# EAGLE board InkTime (EAGLE 9.7.0)
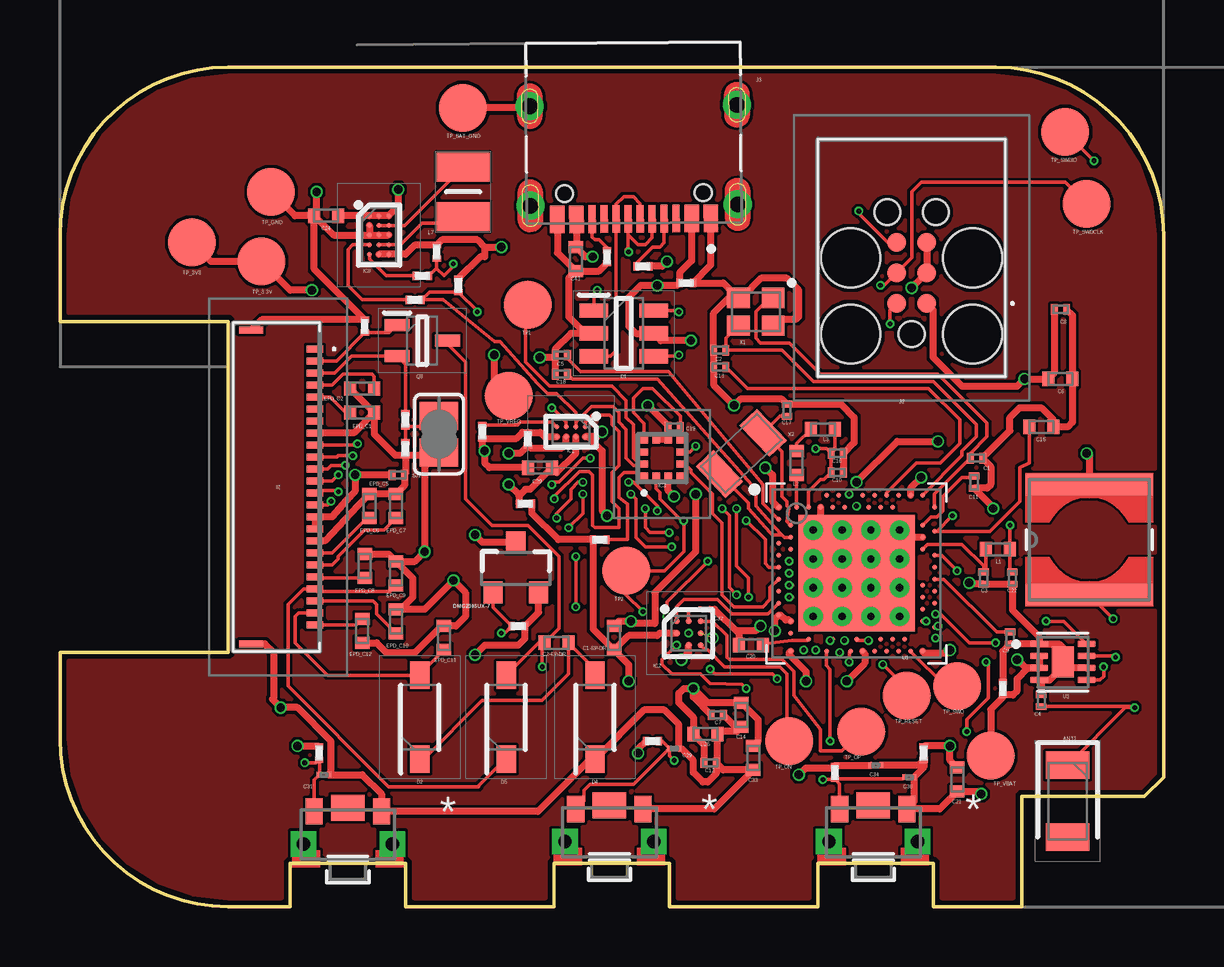
[diagram p0: board, top side]
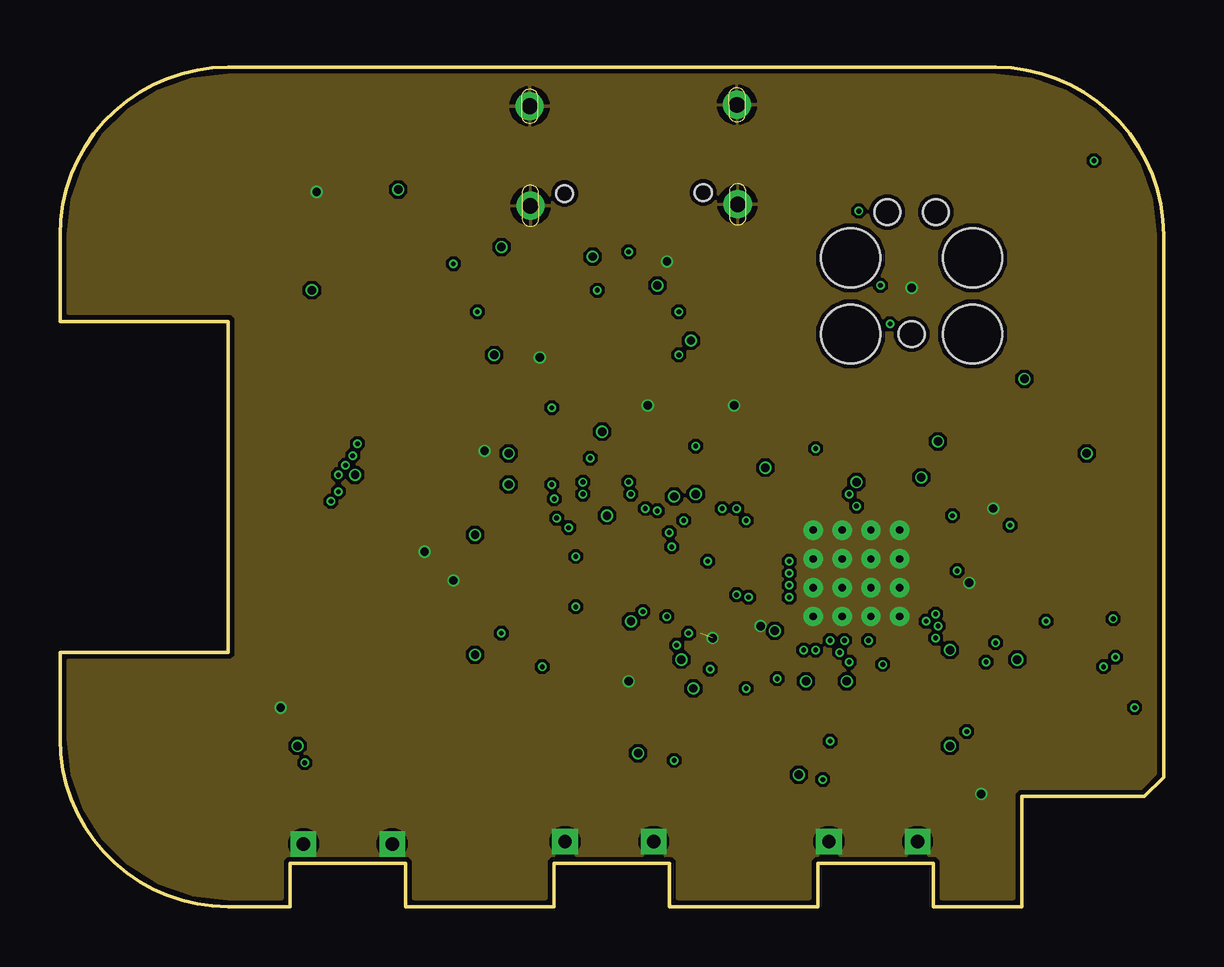
[diagram p1: board, inner layer GND]
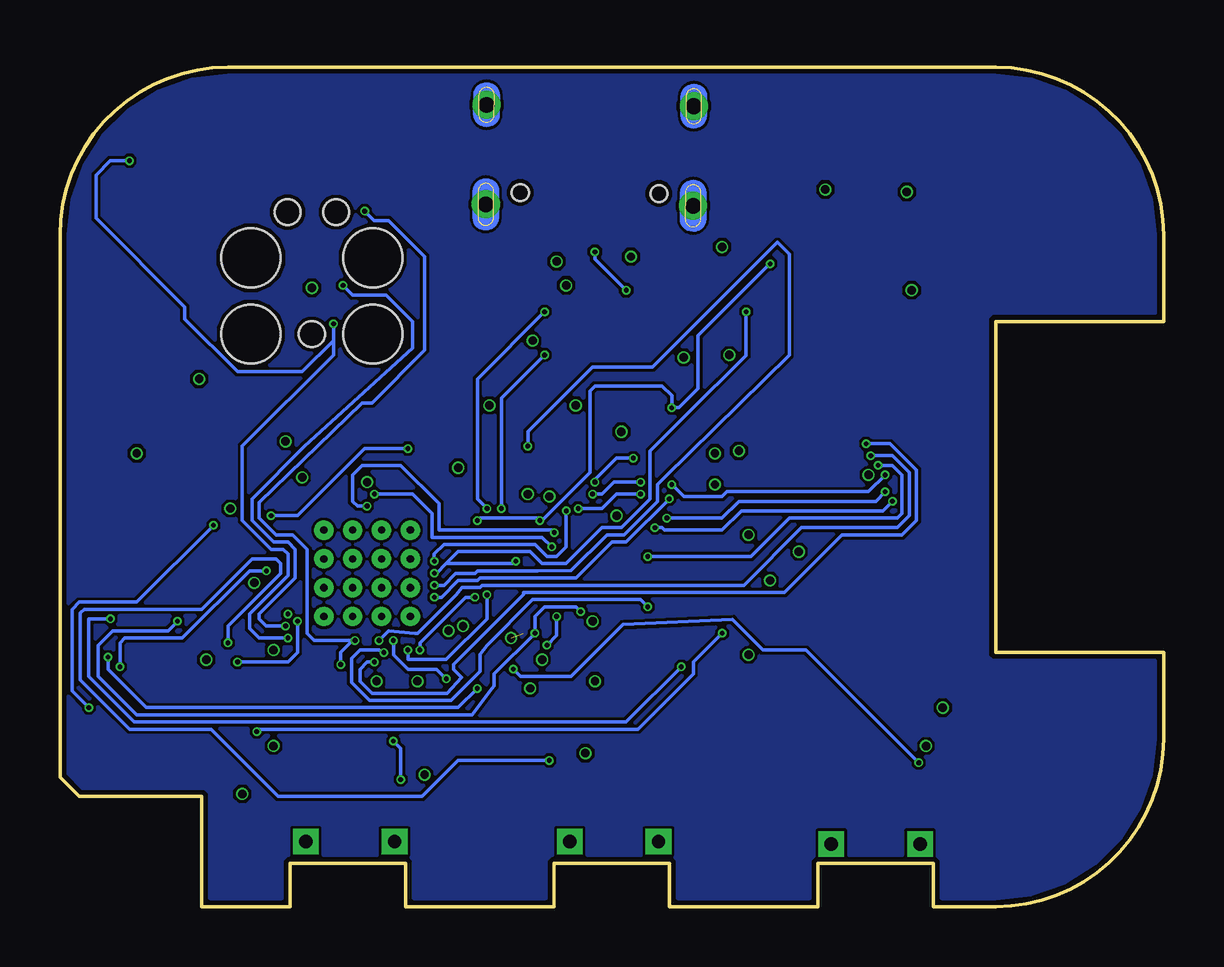
[diagram p2: board, bottom side, seen from below]

Size 46 x 35 mm. Coordinates in mm from the lower left corner, seen from the top.
Outline: 40.1,0 36.4,0 36.4,1.8 31.6,1.8 31.6,0 25.4,0 25.4,1.8 20.6,1.8 20.6,0 14.4,0 14.4,1.8 9.6,1.8 9.6,0 7,0 arc-90 0,7 0,10.6 7,10.6 7,24.4 0,24.4 0,28 arc-90 7,35 39,35 arc-90 46,28 46,5.4 45.2,4.6 40.1,4.6 40.1,0
Copper layers (1+2*63+16): Top / GND / Bottom / layer 63
Stack-up 4 Layer Stack: Top SilkScreen Epoxy Ink / Top SolderMask User Defined 0.02mm Dk 4.3 / Top Surface Finish Lead-Free 0.02mm / Top User Defined 0.03mm / Dielectric-1 User Defined 0.034mm / Dielectric-2 User Defined 0.034mm / GND User Defined 0.03mm / Dielectric-3 User Defined 0.664mm / Power User Defined 0.03mm / Dielectric-4 User Defined 0.034mm / Dielectric-5 User Defined 0.034mm / Bottom User Defined 0.03mm / Bottom Surface Finish Lead-Free 0.02mm / Bottom SolderMask User Defined 0.02mm Dk 4.3 / Bottom SilkScreen Epoxy Ink
Design rules: minimum copper width 5mil, minimum drill size 0.2mm, copper clearance wire_polygon to wire_polygon 5mil, copper clearance wire_polygon to pad_smd 5mil, copper clearance wire_polygon to via 5mil, copper clearance pad_smd to pad_smd 5mil, copper clearance pad_smd to via 5mil, copper clearance via to via 5mil, copper clearance smd to pad (same net) 5mil, copper clearance smd to via (same net) 5mil, copper clearance smd to smd (same net) 5mil, dimension clearance 0.2mm, via restrict clearance 0mil, restrict clearance 0mil, drill distance 6mil, keepout clearance 0mil

## Footprints (pad centres in the part's own frame; a part is rotated, then mirrored left to right if it is on the bottom)
2450AT18B100E_ANTC3216X140N = smd 1.15 x 1.8: 1 -1.5,0; 2 1.5,0
NORDIC_NRF_3_RESC0201_L = smd 0.28 x 0.43: 1 -0.255,0; 2 0.255,0
NORDIC_NRF_3_RESC0402_L = smd 0.5 x 0.6: 1 -0.5,0; 2 0.5,0
GRM011R60J152KE01L_1_0201 = smd 0.35 x 0.25: 1 0,0.275; 2 0,-0.275
GRM011R60J152KE01L_2_CAPC0201X13N = smd 0.22 x 0.23: 1 -0.185,0; 2 0.185,0
ESP32_C6_LIBRARY_3_SOT95P280X145-6N = smd 1.2 x 0.6: 1 -1.25,0.95; 2 -1.25,0; 3 -1.25,-0.95; 4 1.25,-0.95; 5 1.25,0; 6 1.25,0.95
ESP32_C6_LIBRARY_5_SOD3716X135N = smd 1.15 x 0.8: 1 -1.75,0; 2 1.75,0
ESP32_C6_LIBRARY_4_ESP32_C6_LIBRARY_4_ESP32_C6_LIBRARY_4_ESP32_C6_LIBRARY_4_ESP32_WROVER_SPARKFUN-DISCRETESEMI_SOT23-3 = smd 0.8 x 0.9: 1 -0.95,-1; 2 0.95,-1; 3 0,1.1
BQ25180YBGR_BGA8C40P2X4_100X155X50 = smd 0.2 x 0.2: A1 -0.2,0.6; A2 0.2,0.6; B1 -0.2,0.2; B2 0.2,0.2; C1 -0.2,-0.2; C2 0.2,-0.2; D1 -0.2,-0.6; D2 0.2,-0.6
DRV2605YZFR_BGA9C50P3X3_144X144X62 = smd 0.25 x 0.25: A1 -0.5,0.5; A2 0,0.5; A3 0.5,0.5; B1 -0.5,0; B2 0,0; B3 0.5,0; C1 -0.5,-0.5; C2 0,-0.5; C3 0.5,-0.5
BMA423_BMA423 = smd 0.3 x 0.35: 1 -0.75,-0.775; 2 -0.25,-0.775; 3 0.25,-0.775; 4 0.75,-0.775; 7 0.75,0.775; 8 0.25,0.775; 9 -0.25,0.775; 10 -0.75,0.775 | smd 0.35 x 0.3: 5 0.775,-0.25; 6 0.775,0.25; 11 -0.775,0.25; 12 -0.775,-0.25
RT6160AWSC_BGA15C40P3X5_140X230X60 = smd 0.216 x 0.216: A1 -0.4,0.8; A2 0,0.8; A3 0.4,0.8; B1 -0.4,0.4; B2 0,0.4; B3 0.4,0.4; C1 -0.4,0; C2 0,0; C3 0.4,0; D1 -0.4,-0.4; D2 0,-0.4; D3 0.4,-0.4; E1 -0.4,-0.8; E2 0,-0.8; E3 0.4,-0.8
503480-2400_5034802400 = smd 0.3 x 0.7: 1 -5.75,1.525; 2 -5.25,1.525; 3 -4.75,1.525; 4 -4.25,1.525; 5 -3.75,1.525; 6 -3.25,1.525; 7 -2.75,1.525; 8 -2.25,1.525; 9 -1.75,1.525; 10 -1.25,1.525; 11 -0.75,1.525; 12 -0.25,1.525; 13 0.25,1.525; 14 0.75,1.525; 15 1.25,1.525; 16 1.75,1.525; 17 2.25,1.525; 18 2.75,1.525; 19 3.25,1.525; 20 3.75,1.525; 21 4.25,1.525; 22 4.75,1.525; 23 5.25,1.525; 24 5.75,1.525 | smd 0.3 x 1: MP1 -6.54,-1.125; MP2 6.54,-1.125
TC2030-IDC_TC2030IDC = smd 0.783 x 0.783: 1 -0.953,-0.635; 2 -0.953,0.635; 3 0.317,-0.635; 4 0.317,0.635; 5 1.588,-0.635; 6 1.588,0.635 | hole 2.451: -2.223,-2.54; -2.223,2.54; 0.952,-2.54; 0.952,2.54 | hole 1.067: -2.223,0; 2.857,-1.016; 2.857,1.016
KH-TYPE-C-16P_KINGHELM_KH-TYPE-C-16P = smd 0.6 x 1.15: A1_B12 -3.2,4.725; A4_B9 -2.4,4.725; A9_B4 2.4,4.725; A12_B1 3.2,4.725 | smd 0.3 x 1.15: A5 -1.25,4.725; A6 -0.25,4.725; A7 0.25,4.725; A8 1.25,4.725; B5 1.75,4.725; B6 0.75,4.725; B7 -0.75,4.725; B8 -1.75,4.725 | drill 0.65 pad 1.05: SH1 -4.32,0; SH2 4.32,0; SH3 -4.32,4.15; SH4 4.32,4.15 | hole 0.7: -2.89,3.65; 2.89,3.65
NORDIC_NRF_2_RESC0402_L = smd 0.5 x 0.6: 1 -0.5,0; 2 0.5,0
ESP32_C6_LIBRARY_2_IND_4828-WE-TPC_WRE = smd 0.9 x 5.3: 1 -2.286,0; 2 2.286,0
MLP2016SR47MT0S1_INDC2016X100N = smd 1.2 x 2.2: 1 -1.028,0; 2 1.028,0
ESP32_C6_LIBRARY_6_SOT65P210X110-3N = smd 1.05 x 0.5: 1 -1.05,0.65; 2 -1.05,-0.65; 3 1.05,0
CPF0201D7K68C1_0201 = smd 0.35 x 0.25: 1 0,0.275; 2 0,-0.275
ERA-1AEB3401C_0201 = smd 0.35 x 0.25: 1 0,0.275; 2 0,-0.275
ESP32_C6_LIBRARY_7_JUMPER_SJ = smd 1.168 x 1.6: 1 -0.762,0; 2 0.762,0
2025-10-22_07-23-44_LIBRARY_SW_EVP-AKE31A_PAN = smd 0.711 x 1.092: 1 -1.4,-0.972; 2 1.4,-0.972 | drill 0.559 pad 0.914 square: 3 -1.848,0.381; 4 1.848,0.381 | smd 1.397 x 1.092: 5 0,-1.124
HECTOR_WATCH_1_TP20R = smd 2 x 2: TP 0,0
NORDIC_NRF_4_AQFN50P700X700X85_HS-74N = smd 4.85 x 4.85: P$74 0,0 | drill 0.3 pad 0.6: P$75 -1.8,1.8; P$76 -0.6,1.8; P$77 0.6,1.8; P$78 1.8,1.8; P$79 -1.8,0.6; P$80 -0.6,0.6; P$81 0.6,0.6; P$82 1.8,0.6; P$83 -1.8,-0.6; P$84 -0.6,-0.6; P$85 0.6,-0.6; P$86 1.8,-0.6; P$87 -1.8,-1.8; P$88 -0.6,-1.8; P$89 0.6,-1.8; P$90 1.8,-1.8 | smd 0.2 x 0.2: P$A8 -1.25,3.25; P$A10 -0.75,3.25; P$A12 -0.25,3.25; P$A14 0.25,3.25; P$A16 0.75,3.25; P$A18 1.25,3.25; P$A20 1.75,3.25; P$A22 2.25,3.25; P$A23 2.75,3.25; P$AA24 3.25,-2.25; P$AB2 -2.75,-2.5; P$AC5 -2,-2.75; P$AC9 -1,-2.75; P$AC11 -0.5,-2.75; P$AC13 0,-2.75; P$AC15 0.5,-2.75; P$AC17 1,-2.75; P$AC19 1.5,-2.75; P$AC21 2,-2.75; P$AC24 3.25,-2.75; P$AD2 -2.75,-3.25; P$AD4 -2.25,-3.25; P$AD6 -1.75,-3.25; P$AD8 -1.25,-3.25; P$AD10 -0.75,-3.25; P$AD12 -0.25,-3.25; P$AD14 0.25,-3.25; P$AD16 0.75,-3.25; P$AD18 1.25,-3.25; P$AD20 1.75,-3.25; P$AD22 2.25,-3.25; P$AD23 2.75,-3.25; P$B1 -3.25,2.75; P$B3 -2.5,2.75; P$B5 -2,2.75; P$B7 -1.5,2.75; P$B9 -1,2.75; P$B11 -0.5,2.75; P$B13 0,2.75; P$B15 0.5,2.75; P$B17 1,2.75; P$B19 1.5,2.75; P$B24 3.25,2.75; P$C1 -3.25,2.25; P$D2 -2.75,2; P$D23 2.75,2; P$E24 3.25,1.75; P$F2 -2.75,1.5; P$F23 2.75,1.5; P$G1 -3.25,1.25; P$H2 -2.75,1; P$H23 2.75,1; P$J1 -3.25,0.75; P$J24 3.25,0.75; P$K2 -2.75,0.5; P$L1 -3.25,0.25; P$L24 3.25,0.25; P$M2 -2.75,0; P$N1 -3.25,-0.25; P$N24 3.25,-0.25; P$P2 -2.75,-0.5; P$P23 2.75,-0.5; P$R1 -3.25,-0.75; P$R24 3.25,-0.75; P$T2 -2.75,-1; P$T23 2.75,-1; P$U1 -3.25,-1.25; P$U24 3.25,-1.25; P$V23 2.75,-1.5; P$W1 -3.25,-1.75; P$W24 3.25,-1.75; P$Y2 -2.75,-2; P$Y23 2.75,-2
ESP32_C6_LIBRARY_SON50P200X200X80-9N = smd 0.76 x 0.27: 1 -0.985,0.75; 2 -0.985,0.25; 3 -0.985,-0.25; 4 -0.985,-0.75; 5 0.985,-0.75; 6 0.985,-0.25; 7 0.985,0.25; 8 0.985,0.75 | smd 0.9 x 1.3: 9 0,0
NORDIC_NRF_BT-XTAL_2016_N = smd 0.95 x 0.85: 1 -0.725,-0.575; 2 0.725,-0.575; 3 0.725,0.575; 4 -0.725,0.575
NORDIC_NRF_1_XTAL_3215_N = smd 1 x 1.8: 1 -1.25,0; 2 1.25,0

## Placement (x,y rotation side)
ANT1  2450AT18B100E_2450AT18B100E  [2450AT18B100E_ANTC3216X140N]  42,4.4 270 top
C1  12pF  [NORDIC_NRF_3_RESC0201_L]  38.2,18.7 0 top
C1-EP-DR  10uF  [NORDIC_NRF_3_RESC0402_L]  23.1,11.2 270 top
C2  12pF  [NORDIC_NRF_3_RESC0201_L]  27.5,23.2 180 top
C2-EP-DR  4.7uF/25V  [NORDIC_NRF_3_RESC0402_L]  20.7,11 180 top
C3  1pF  [NORDIC_NRF_3_RESC0201_L]  38.5,13.7 270 top
C4  1pF  [NORDIC_NRF_3_RESC0201_L]  40.9,8.6 90 top
C5  100nF  [NORDIC_NRF_3_RESC0201_L]  20.9,23 180 top
C6  4.7μF  [NORDIC_NRF_3_RESC0402_L]  41.7,22 0 top
C7  100nF  [NORDIC_NRF_3_RESC0201_L]  27.4,8 0 top
C8  100nF  [NORDIC_NRF_3_RESC0201_L]  41.7,24.9 0 top
C9  820pF  [NORDIC_NRF_3_RESC0201_L]  39.6,11.2 270 top
C10  N.C.  [NORDIC_NRF_3_RESC0201_L]  32.4,18.1 0 top
C11  100pF  [NORDIC_NRF_3_RESC0201_L]  38.1,17.7 270 top
C12  100nF  [NORDIC_NRF_3_RESC0201_L]  27.1,6 0 top
C13  N.C.  [NORDIC_NRF_3_RESC0201_L]  27.5,22.5 180 top
C14  4.7μF  [NORDIC_NRF_3_RESC0402_L]  28.4,8 270 top
C15  1.0μF  [NORDIC_NRF_3_RESC0402_L]  40.9,20 0 top
C16  47nF  [NORDIC_NRF_3_RESC0201_L]  32.4,18.9 0 top
C17  12pF  [NORDIC_NRF_3_RESC0201_L]  30.3,20.7 270 top
C18  12pF  [NORDIC_NRF_3_RESC0201_L]  20.9,22.2 0 top
C19  100nF  [NORDIC_NRF_3_RESC0201_L]  25.6,20 180 top
C20  4.7μF  [NORDIC_NRF_3_RESC0402_L]  28.8,10.9 180 top
C21  4.7μF  [NORDIC_NRF_3_RESC0402_L]  37.4,5.3 270 top
C22  N.C.  [NORDIC_NRF_3_RESC0201_L]  39.7,13.7 270 top
C23  0.1uF  [GRM011R60J152KE01L_1_0201]  19.4,16.8 90 top
C24  10uF  [NORDIC_NRF_3_RESC0402_L]  11.1,28.8 0 top
C25  22uF  [NORDIC_NRF_3_RESC0402_L]  26.9,7.2 0 top
C27  o.1uF  [GRM011R60J152KE01L_1_0201]  39.3,9.1 0 top
C29  1uF  [GRM011R60J152KE01L_2_CAPC0201X13N]  25.6,6.6 180 top
C30  1uF  [GRM011R60J152KE01L_2_CAPC0201X13N]  35.4,5.4 180 top
C31  1uF  [GRM011R60J152KE01L_2_CAPC0201X13N]  11,5.5 180 top
C32  1uF  [GRM011R60J152KE01L_2_CAPC0201X13N]  26.9,12.4 180 top
C33  22uF  [NORDIC_NRF_3_RESC0402_L]  28.9,6.2 270 top
C34  0.1uF  [GRM011R60J152KE01L_2_CAPC0201X13N]  34,5.9 180 top
C37  1uF  [GRM011R60J152KE01L_1_0201]  19.5,19.5 0 top
C38  1uF  [GRM011R60J152KE01L_1_0201]  36,6.4 180 top
C39  10uF  [NORDIC_NRF_3_RESC0402_L]  20,18.3 180 top
C42  0.1uF  [GRM011R60J152KE01L_1_0201]  26.1,26 90 top
C43  4.7uF  [NORDIC_NRF_3_RESC0402_L]  21.5,27 270 top
D1  USBLC6-2SC6Y  [ESP32_C6_LIBRARY_3_SOT95P280X145-6N]  23.5,23.9 0 top
D2  MBR0530  [ESP32_C6_LIBRARY_5_SOD3716X135N]  15,7.9 90 top
D4  MBR0530  [ESP32_C6_LIBRARY_5_SOD3716X135N]  22.3,7.9 90 top
D5  MBR0530  [ESP32_C6_LIBRARY_5_SOD3716X135N]  18.6,7.9 90 top
DMG2305UX-7  20V/4.2A/52mΩ/1.4W  [ESP32_C6_LIBRARY_4_ESP32_C6_LIBRARY_4_ESP32_C6_LIBRARY_4_ESP32_C6_LIBRARY_4_ESP32_WROVER_SPARKFUN-DISCRETESEMI_SOT23-3]  19,14.1 0 top
EPD_C1  1uF/50V  [NORDIC_NRF_3_RESC0402_L]  12.6,20.6 180 top
EPD_C2  1uF/50V  [NORDIC_NRF_3_RESC0402_L]  12.6,21.6 0 top
EPD_C5  0.1uF/50V  [NORDIC_NRF_3_RESC0201_L]  14.1,18 180 top
EPD_C6  1uF/50V  [NORDIC_NRF_3_RESC0402_L]  12.9,16.7 270 top
EPD_C7  1uF/50V  [NORDIC_NRF_3_RESC0402_L]  14,16.7 270 top
EPD_C8  1uF/50V  [NORDIC_NRF_3_RESC0402_L]  12.7,14.2 270 top
EPD_C9  1uF/50V  [NORDIC_NRF_3_RESC0402_L]  14,13.9 270 top
EPD_C10  1uF/50V  [NORDIC_NRF_3_RESC0402_L]  14,11.9 270 top
EPD_C11  1uF/50V  [NORDIC_NRF_3_RESC0402_L]  16,11.2 270 top
EPD_C12  1uF/50V  [NORDIC_NRF_3_RESC0402_L]  12.6,11.5 90 top
IC1  BQ25180YBGR_BQ25180YBGR  [BQ25180YBGR_BGA8C40P2X4_100X155X50]  21.3,19.8 270 top
IC2  DRV2605YZFR  [DRV2605YZFR_BGA9C50P3X3_144X144X62]  26.2,11.4 0 top
IC3  BMA423  [BMA423_BMA423]  25.1,18.7 0 top
IC9  RT6160AWSC_RT6160AWSC  [RT6160AWSC_BGA15C40P3X5_140X230X60]  13.3,28 0 top
J1  503480-2400_503480-2400  [503480-2400_5034802400]  9.1,17.5 270 top
J2  TC2030-IDC_TC2030-IDC  [TC2030-IDC_TC2030IDC]  35.5,26.1 90 top
J3  KH-TYPE-C-16P_KH-TYPE-C-16P  [KH-TYPE-C-16P_KINGHELM_KH-TYPE-C-16P]  23.9,33.4 180.4 top
L1  3.9nH  [NORDIC_NRF_2_RESC0402_L]  39.1,14.9 0 top
L2  10μH  [NORDIC_NRF_2_RESC0402_L]  30.7,18.5 90 top
L3  15nH  [NORDIC_NRF_2_RESC0402_L]  31.8,19.9 0 top
L5  68uH  [ESP32_C6_LIBRARY_2_IND_4828-WE-TPC_WRE]  42.9,15.3 90 top
L7  FTC252012SR47MBCA  [MLP2016SR47MT0S1_INDC2016X100N]  16.8,29.8 270 top
Q3  SI1308EDL-T1-GE3  [ESP32_C6_LIBRARY_6_SOT65P210X110-3N]  15.1,23.6 0 top
R1_EP_DR  0.47  [CPF0201D7K68C1_0201]  14.4,20.3 180 top
R1_USB  5k1  [ERA-1AEB3401C_0201]  24.3,26.7 270 top
R2  0  [CPF0201D7K68C1_0201]  15.1,26.3 270 top
R2_EP_DR  10K  [CPF0201D7K68C1_0201]  12.7,24.2 0 top
R2_USB  5K1  [ERA-1AEB3401C_0201]  22.8,27.1 0 top
R3  0  [CPF0201D7K68C1_0201]  22.5,15.3 90 top
R4  0  [CPF0201D7K68C1_0201]  14.8,25.3 270 top
R5  10K  [ERA-1AEB3401C_0201]  32.3,5.6 180 top
R7  10K  [ERA-1AEB3401C_0201]  24.7,6.9 270 top
R8  10K  [ERA-1AEB3401C_0201]  10.8,6.4 180 top
R9  10K  [CPF0201D7K68C1_0201]  17.6,19.8 180 top
R17  3K3  [CPF0201D7K68C1_0201]  16.6,25.9 0 top
R18  3K3  [CPF0201D7K68C1_0201]  15.7,27.3 0 top
R_RWR_EPD  10K  [CPF0201D7K68C1_0201]  19.1,11.7 90 top
R_TYPE_SEL  2.2  [CPF0201D7K68C1_0201]  14.4,19.1 180 top
SJ1  [ESP32_C6_LIBRARY_7_JUMPER_SJ]  15.8,19.7 90 top
SW_DN  2025-10-22_07-23-44_LIBRARY_EVP-AKE31ASW_EVP-AKE31A_PAN  [2025-10-22_07-23-44_LIBRARY_SW_EVP-AKE31A_PAN]  22.9,3.1 180 top
SW_ENT  2025-10-22_07-23-44_LIBRARY_EVP-AKE31ASW_EVP-AKE31A_PAN  [2025-10-22_07-23-44_LIBRARY_SW_EVP-AKE31A_PAN]  12,3 180 top
SW_UP  2025-10-22_07-23-44_LIBRARY_EVP-AKE31ASW_EVP-AKE31A_PAN  [2025-10-22_07-23-44_LIBRARY_SW_EVP-AKE31A_PAN]  33.9,3.1 180 top
TP1  HECTOR_WATCH_1_TPTP20R  [HECTOR_WATCH_1_TP20R]  19.5,25.1 90 top
TP2  HECTOR_WATCH_1_TPTP20R  [HECTOR_WATCH_1_TP20R]  23.6,14 0 top
TP_3.3V  HECTOR_WATCH_1_TPTP20R  [HECTOR_WATCH_1_TP20R]  8.4,26.9 0 top
TP_3V3  HECTOR_WATCH_1_TPTP20R  [HECTOR_WATCH_1_TP20R]  5.5,27.7 0 top
TP_BAT_GND  HECTOR_WATCH_1_TPTP20R  [HECTOR_WATCH_1_TP20R]  16.8,33.3 0 top
TP_GND  HECTOR_WATCH_1_TPTP20R  [HECTOR_WATCH_1_TP20R]  8.8,29.8 0 top
TP_ON  HECTOR_WATCH_1_TPTP20R  [HECTOR_WATCH_1_TP20R]  30.4,6.9 0 top
TP_OP  HECTOR_WATCH_1_TPTP20R  [HECTOR_WATCH_1_TP20R]  33.4,7.3 0 top
TP_RESET  HECTOR_WATCH_1_TPTP20R  [HECTOR_WATCH_1_TP20R]  35.3,8.8 0 top
TP_SWDCLK  HECTOR_WATCH_1_TPTP20R  [HECTOR_WATCH_1_TP20R]  42.8,29.3 0 top
TP_SWDIO  HECTOR_WATCH_1_TPTP20R  [HECTOR_WATCH_1_TP20R]  41.9,32.3 0 top
TP_SWO  HECTOR_WATCH_1_TPTP20R  [HECTOR_WATCH_1_TP20R]  37.4,9.2 0 top
TP_VBAT  HECTOR_WATCH_1_TPTP20R  [HECTOR_WATCH_1_TP20R]  38.8,6.3 0 top
TP_VREG  HECTOR_WATCH_1_TPTP20R  [HECTOR_WATCH_1_TP20R]  18.7,21.3 0 top
U1  NORDIC_NRF_4_NRF52840_QF  [NORDIC_NRF_4_AQFN50P700X700X85_HS-74N]  33.2,13.9 0 top
U3  MAX17048G+T10  [ESP32_C6_LIBRARY_SON50P200X200X80-9N]  41.8,10.2 0 top
X1  32MHz  [NORDIC_NRF_BT-XTAL_2016_N]  29,24.8 180 top
X2  [NORDIC_NRF_1_XTAL_3215_N]  28.4,18.9 223.2 top

## Library data of the parts
ANT1 = InkTime_v5; ARROW_PART_NUMBER: 2450AT18B100E; ARROW_PRICE-STOCK: https://www.arrow.com/en/products/2450at18b100e/johanson-dielectrics?utm_currency=USD&region=nac; DESCRIPTION: Antennas 2.45GHz ANTENNA; HEIGHT: 1.4mm; MANUFACTURER_NAME: JOHANSON TECHNOLOGY; MANUFACTURER_PART_NUMBER: 2450AT18B100E; MOUSER_PART_NUMBER: 609-2450AT18B100E; MOUSER_PRICE-STOCK: https://www.mouser.co.uk/ProductDetail/Johanson-Technology/2450AT18B100E?qs=yCnrNFeXz%252Bh5MFsFIXGZGA%3D%3D
C1 C1-EP-DR C2 C2-EP-DR C3-C25 C27 C33 C37-C39 C42 C43 EPD_C1 EPD_C2 EPD_C5-EPD_C12 L1-L3 R1_EP_DR R1_USB R2 R2_EP_DR R2_USB R3-R5 R7-R9 R17 R18 R_RWR_EPD R_TYPE_SEL SJ1 TP1 TP2 TP_3.3V TP_3V3 TP_BAT_GND TP_GND TP_ON TP_OP TP_RESET TP_SWDCLK TP_SWDIO TP_SWO TP_VBAT TP_VREG U1 X1 X2 = InkTime_v5
C29-C32 C34 = InkTime_v5; AVAILABILITY: In Stock; CHECK_PRICES: https://www.snapeda.com/parts/GRM011R60J152KE01L/Murata/view-part/?ref=eda; DESCRIPTION: SMD Capacitor X5R(EIA) with Capacitance: 1500pF Tol. 10%. Rated Voltage: 6.3Vdc; MF: Murata; MP: GRM011R60J152KE01L; PACKAGE: 0201 Murata; PRICE: None; SNAPEDA_LINK: https://www.snapeda.com/parts/GRM011R60J152KE01L/Murata/view-part/?ref=snap
D1 = InkTime_v5; AVAILABILITY: In Stock; CHECK_PRICES: https://www.snapeda.com/parts/USBLC6-2SC6Y/STMicroelectronics/view-part/?ref=eda; DESCRIPTION: 17V Clamp 5A (8/20µs) Ipp Tvs Diode Surface Mount SOT-23-6; MF: STMicroelectronics; MP: USBLC6-2SC6Y; PACKAGE: SOT-23-6 STMicroelectronics; PRICE: None; SNAPEDA_LINK: https://www.snapeda.com/parts/USBLC6-2SC6Y/STMicroelectronics/view-part/?ref=snap
D2 D4 D5 = InkTime_v5; AVAILABILITY: In Stock; CHECK_PRICES: https://www.snapeda.com/parts/MBR0530/Onsemi/view-part/?ref=eda; DESCRIPTION: Diode Schottky 30 V 500mA Surface Mount SOD-123; MF: ON Semiconductor; MP: MBR0530; PACKAGE: SOD-123-2 ON Semiconductor; PRICE: None; PURCHASE-URL: https://www.snapeda.com/api/url_track_click_mouser/?unipart_id=179458&manufacturer=ON Semiconductor&part_name=MBR0530&search_term=None; SNAPEDA_LINK: https://www.snapeda.com/parts/MBR0530/Onsemi/view-part/?ref=snap
DMG2305UX-7 = InkTime_v5; PROD_ID: TRAN-14388
IC1 = InkTime_v5; ARROW_PART_NUMBER: BQ25180YBGR; ARROW_PRICE-STOCK: https://www.arrow.com/en/products/bq25180ybgr/texas-instruments?utm_currency=USD&region=nac; DESCRIPTION: Charger IC Lithium Ion/Polymer, Lithium Iron Phosphate 8-DSBGA (1.6x1.1); HEIGHT: 0.5mm; MANUFACTURER_NAME: Texas Instruments; MANUFACTURER_PART_NUMBER: BQ25180YBGR; MOUSER_PART_NUMBER: 595-BQ25180YBGR; MOUSER_PRICE-STOCK: https://www.mouser.co.uk/ProductDetail/Texas-Instruments/BQ25180YBGR?qs=doiCPypUmgEWjAK%252BJAX6Tw%3D%3D
IC2 = InkTime_v5; ARROW_PART_NUMBER: DRV2605YZFR; ARROW_PRICE-STOCK: https://www.arrow.com/en/products/drv2605yzfr/texas-instruments?region=nac; DESCRIPTION: Haptic Driver for ERM/LRA with Built-In Library and Smart Loop Architecture; HEIGHT: 0.625mm; MANUFACTURER_NAME: Texas Instruments; MANUFACTURER_PART_NUMBER: DRV2605YZFR
IC3 = InkTime_v5; ARROW_PART_NUMBER: BMA423; ARROW_PRICE-STOCK: https://www.arrow.com/en/products/bma423/bosch; DESCRIPTION: Accelerometers Triaxial low-g 12bit Acceleration Sensor; HEIGHT: 1mm; MANUFACTURER_NAME: BOSCH; MANUFACTURER_PART_NUMBER: BMA423; MOUSER_PART_NUMBER: 262-BMA423; MOUSER_PRICE-STOCK: https://www.mouser.co.uk/ProductDetail/Bosch-Sensortec/BMA423?qs=HXFqYaX1Q2xC%252BSgeGoX3mg%3D%3D
IC9 = InkTime_v5; DESCRIPTION: Buck-Boost Regulator Positive Output Step-Up/Step-Down I2C DC-DC Controller IC 15-WL-CSP (BSC) (1.4x2.3); HEIGHT: 0.6mm; MANUFACTURER_NAME: RICHTEK; MANUFACTURER_PART_NUMBER: RT6160AWSC; MOUSER_PART_NUMBER: 835-RT6160AWSC; MOUSER_PRICE-STOCK: https://www.mouser.co.uk/ProductDetail/Richtek/RT6160AWSC?qs=amGC7iS6iy%2FLd9PSoixZXQ%3D%3D
J1 = InkTime_v5; DESCRIPTION: FFC & FPC Connectors 0.5mm FPC RA SMT Dual Contact 24Ckt; HEIGHT: 1.87mm; MANUFACTURER_NAME: Molex; MANUFACTURER_PART_NUMBER: 503480-2400; MOUSER_PART_NUMBER: 538-503480-2400; MOUSER_PRICE-STOCK: https://www.mouser.co.uk/ProductDetail/Molex/503480-2400?qs=OAhjpuo3Vu7efIoxFh9AOw%3D%3D
J2 = InkTime_v5; DESCRIPTION: CABLE ADAPTER 6 POS; HEIGHT: 19mm; MANUFACTURER_NAME: Tag Connect; MANUFACTURER_PART_NUMBER: TC2030-IDC
J3 = InkTime_v5; AVAILABILITY: Not in stock; CHECK_PRICES: https://www.snapeda.com/parts/KH-TYPE-C-16P/Kinghelm/view-part/?ref=eda; MF: kinghelm; MP: KH-TYPE-C-16P; PACKAGE: None; PRICE: None; SNAPEDA_LINK: https://www.snapeda.com/parts/KH-TYPE-C-16P/Kinghelm/view-part/?ref=snap
L5 = InkTime_v5; COPYRIGHT: Copyright (C) 2024 Ultra Librarian. All rights reserved.; MANUFACTURER_PART_NUMBER: 744043680; MFR_NAME: Wurth Electronics
L7 = InkTime_v5; DESCRIPTION: SMD / SMT Inductors (Coils), L=0.47?H, L x W x T :; HEIGHT: 1mm; JLCPCB: https://jlcpcb.com/partdetail/6763488-FTC252012SR47MBCA/C5832368; MANUFACTURER_NAME: TDK; MANUFACTURER_PART_NUMBER: FTC252012SR47MBCA
Q3 = InkTime_v5; AVAILABILITY: In Stock; CHECK_PRICES: https://www.snapeda.com/parts/SI1308EDL-T1-GE3/Vishay+Siliconix/view-part/?ref=eda; DESCRIPTION: Si1308EDL-T1-GE3 N-channel MOSFET Transistor, 1.5 A, 30 V, 3-Pin SC-70 | Siliconix / Vishay SI1308EDL-T1-GE3; MF: Vishay Siliconix; MP: SI1308EDL-T1-GE3; PACKAGE: SOT-323 Vishay Semiconductor; PRICE: None; PURCHASE-URL: https://www.snapeda.com/api/url_track_click_mouser/?unipart_id=274603&manufacturer=Vishay Siliconix&part_name=SI1308EDL-T1-GE3&search_term=None; SNAPEDA_LINK: https://www.snapeda.com/parts/SI1308EDL-T1-GE3/Vishay+Siliconix/view-part/?ref=snap
SW_DN SW_ENT SW_UP = InkTime_v5; COPYRIGHT: Copyright (C) 2025 Ultra Librarian. All rights reserved.; DIGI-KEY_PART_NUMBER_1: P123437TR-ND; DIGI-KEY_PART_NUMBER_2: P123437CT-ND; DIGI-KEY_PART_NUMBER_3: P123437DKR-ND; MANUFACTURER_NAME: Panasonic; MANUFACTURER_PART_NUMBER: EVP-AKE31A
U3 = InkTime_v5; AVAILABILITY: In Stock; CHECK_PRICES: https://www.snapeda.com/parts/MAX17048G+T10/Analog+Devices/view-part/?ref=eda; DESCRIPTION: 3µA 1-Cell/2-Cell Fuel Gauge with ModelGauge; MF: Analog Devices; MP: MAX17048G+T10; PACKAGE: TDFN-8 Maxim; PRICE: None; PURCHASE-URL: https://www.snapeda.com/api/url_track_click_mouser/?unipart_id=329239&manufacturer=Analog Devices&part_name=MAX17048G+T10&search_term=None; SNAPEDA_LINK: https://www.snapeda.com/parts/MAX17048G+T10/Analog+Devices/view-part/?ref=snap

## Nets
3V3: C6.1 C7.1 C8.1 C12.1 C14.1 C25.1 C33.1 C34.2 DMG2305UX-7.2 IC2.C2 IC3.3 IC9.E2 IC9.E3 J2.1 R5.2 R7.2 R8.2 R17.1 R18.1 R_RWR_EPD.2 TP_3.3V.TP TP_3V3.TP U1.P$A22 U1.P$AD14 U1.P$AD23 U1.P$B1 U1.P$W1 U1.P$Y2
ALERT: U1.P$J24 U3.5
D+: D1.4 U1.P$AD6
D-: D1.6 U1.P$AD4
DEC1: C5.1 U1.P$C1
DN: D1.1 J3.A7 J3.B7
DP: D1.3 J3.A6 J3.B6
EPD_3V3: C1-EP-DR.1 DMG2305UX-7.3 EPD_C5.2 J1.15 J1.16 L5.2
EPD_BUSY: J1.9 U1.P$AD12
EPD_CS: J1.12 U1.P$K2
EPD_DC: J1.11 U1.P$AD10
EPD_RST: J1.10 U1.P$AC11
GDR: J1.2 Q3.1 R2_EP_DR.2
GND: C1-EP-DR.2 C1.2 C2.2 C3.2 C4.2 C5.2 C6.2 C7.2 C8.2 C9.2 C10.2 C11.2 C12.2 C13.2 C14.2 C15.2 C16.2 C17.1 C18.1 C19.2 C20.2 C21.2 C22.2 C23.2 C24.1 C25.2 C27.1 C29.1 C30.1 C31.1 C32.1 C33.2 C34.1 C37.1 C38.1 C39.2 C42.2 C43.2 D1.2 D4.1 EPD_C1.1 EPD_C2.1 EPD_C5.1 EPD_C6.1 EPD_C7.1 EPD_C8.1 EPD_C9.1 EPD_C10.1 EPD_C11.1 EPD_C12.1 IC1.D2 IC2.B1 IC2.B3 IC3.8 IC3.9 IC9.B1 IC9.C1 IC9.C2 IC9.C3 J1.8 J1.17 J1.MP1 J1.MP2 J2.3 J2.5 J3.A1_B12 J3.A12_B1 J3.SH1 J3.SH2 J3.SH3 J3.SH4 R1_USB.1 R2_EP_DR.1 R2_USB.2 R3.1 R9.1 R_TYPE_SEL.1 SJ1.1 SW_DN.1 SW_ENT.1 SW_UP.1 TP_BAT_GND.TP TP_GND.TP U1.P$74 U1.P$75 U1.P$76 U1.P$77 U1.P$78 U1.P$79 U1.P$80 U1.P$81 U1.P$82 U1.P$83 U1.P$84 U1.P$85 U1.P$86 U1.P$87 U1.P$88 U1.P$89 U1.P$90 U1.P$B7 U1.P$F23 U3.1 U3.4 U3.6 U3.9 X1.2 X1.4
HAPTIC_EN: IC2.A1 U1.P$U1
IMU_INT1: IC3.5 U1.P$N1
IMU_INT2: IC3.6 U1.P$P2
LX1: IC9.B2 IC9.B3 L7.1
LX2: IC9.D2 IC9.D3 L7.2
MOSI: J1.14 U1.P$B13
N$1: C17.2 U1.P$D2 X2.1
N$2: C18.2 U1.P$F2 X2.2
N$4: L2.2 L3.1
N$5: L2.1 U1.P$B3
N$6: C10.1 C15.1 C16.1 L3.2 U1.P$B5 U1.P$E24
N$7: C13.1 U1.P$A18
N$8: C11.1 U1.P$D23
N$9: C1.1 U1.P$B24 X1.1
N$11: C2.1 U1.P$A23 X1.3
N$12: C9.1 U1.P$N24
N$13: IC1.D1 R9.2
N$14: C3.1 L1.1 U1.P$H23
N$15: ANT1.1 C4.1 C22.1 L1.2
N$16: C20.1 U1.P$AC5
N$20: C19.1 IC3.7 IC3.10
N$21: IC3.1 R3.2
N$22: R1_EP_DR.1 R_TYPE_SEL.2 SJ1.2
N$23: IC9.E1 R2.2
N$24: J3.B5 R2_USB.1
N$26: IC9.D1 R4.2
N$28: C2-EP-DR.2 D5.2 L5.1 Q3.3
N$29: C2-EP-DR.1 D2.1 D4.2
N$30: C32.2 IC2.A2
N$31: EPD_C2.2 J1.4
N$32: EPD_C1.2 J1.5
N$34: EPD_C6.2 J1.18
N$35: EPD_C7.2 J1.19
N$36: EPD_C8.2 J1.20
N$37: J3.A5 R1_USB.2
N$38: EPD_C10.2 J1.22
N$40: EPD_C12.2 J1.24
OUT+: IC2.A3 TP_OP.TP
OUT-: IC2.C3 TP_ON.TP
P0.04: U1.P$J1
P0.09: U1.P$L24
P0.13: C30.2 R5.1 SW_UP.2 U1.P$AD8
P0.14: C31.2 R8.1 SW_ENT.2 U1.P$AC9
P0.19: U1.P$AC15
P0.20: U1.P$AD16
P0.21: U1.P$AC17
P0.22: U1.P$AD18
P0.23: U1.P$AC19
P0.24: U1.P$AD20
P0.25: U1.P$AC21
P0.26: U1.P$G1
P0.27: U1.P$H2
P0.28: U1.P$B11
P0.29: U1.P$A10
P0.30: U1.P$B9
P0.31: U1.P$A8
P1.01: DMG2305UX-7.1 R_RWR_EPD.1 U1.P$Y23
P1.02: C29.2 R7.1 SW_DN.2 U1.P$W24
P1.03: U1.P$V23
P1.04: U1.P$U24
P1.05: U1.P$T23
P1.06: U1.P$R24
P1.07: U1.P$P23
P1.09: U1.P$R1
P1.10: U1.P$A20
P1.11: U1.P$B19
P1.12: U1.P$B17
P1.13: U1.P$A16
P1.14: U1.P$B15
P1.15: U1.P$A14
PMIC_INT: IC1.A1 U1.P$T2
PREVGH: D5.1 EPD_C9.2 J1.21
PREVGL: D2.2 EPD_C11.2 J1.23
RESE: J1.3 Q3.2 R1_EP_DR.2
RESET: J2.6 TP_RESET.TP U1.P$AC13
SCK: J1.13 U1.P$A12
SCL: IC1.B1 IC2.C1 IC3.12 R4.1 R17.2 TP1.TP U1.P$M2 U3.7
SDA: IC1.C1 IC2.B2 IC3.2 R2.1 R18.2 TP2.TP U1.P$L1 U3.8
SWDCLK: J2.4 TP_SWDCLK.TP U1.P$AA24
SWDIO: J2.2 TP_SWDIO.TP U1.P$AC24
SWO: TP_SWO.TP U1.P$AD22
VBAT: C27.2 C37.2 IC1.C2 TP_VBAT.TP U3.2 U3.3
VBUS: C21.1 C38.2 C42.1 C43.1 D1.5 IC1.A2 J3.A4_B9 J3.A9_B4 U1.P$AD2
VREG: C23.1 C24.2 C39.1 IC1.B2 IC9.A1 IC9.A2 IC9.A3 TP_VREG.TP

## Tracks (layer width: path | path; a pad name or v marks a point on that pad's centre or on a via)
3V3  (via drill 0.35)
  Top 0.3: U1.P$Y2 30.4,11.95 30.25,11.95 30.05,12.15 U1.P$W1 29.8,12 v29.8,11.5 | C8.1 41.45,22.25 C6.1 v40.2,22 39.9,21.7 37.6,21.7 36.4,22.9 36.4,24.88 J2.1 | C33.1 29.1,6.9 29.1,7.8 C14.1 27,8.5 v26.4,9.1 | IC9.E2 IC9.E3 14.4,27.2 14.78,27.57 R18.1 15.93,27.8 17.4,27.8 17.7,27.5 | v30.8,5.5 31.07,5.78 32.2,5.78 R5.2 33.79,5.88 C34.2 | R7.2 24.1,6.57 v24.1,6.4 | v17.3,10.5 17.7,10.9 19.1,10.9 19.38,11.18 R_RWR_EPD.2 19.95,12.28 DMG2305UX-7.2 | R8.2 9.93,6.68 v9.9,6.7 | v25.9,10.3 26.2,10.6 IC2.C2 | v35.9,17.9 35.45,17.45 U1.P$A22 | v29.4,18.3 29.7,18 29.7,16.9 U1.P$B1 | v25.6,17.1 25.35,17.35 IC3.3 | 17.7,27.5 v18.4,27.5 | 17.7,27.5 17.7,27.1 17.52,27.1 R17.1 | v10.5,25.7 9.6,25.7 TP_3.3V.TP 6.3,26.9 TP_3V3.TP | v32.8,9.4 33.55,10.15 33.55,10.55 U1.P$AD14 | v26.4,9.1 26,9.1 25.8,8.9 25.8,8.5 26.4,7.9 C25.1 26.84,6.76 C12.1 | C7.1 26.4,8.74 v26.4,9.1 | v37.1,10.7 36.95,10.55 36.05,10.55 U1.P$AD23
  Power 0.3: v10.5,25.7 10.6,25.8 | v29.8,11.5 29.9,11.5 | v35.9,17.9 35.8,18
  pour Power: -0.4,-0.2 -0.4,35.1 46.3,35.1 46.3,5.2 45.7,4.6 40.1,4.6 40.1,-0.2
ALERT  (via drill 0.2)
  Top 0.15: U1.P$J24 36.75,14.65 v37.4,14 | U3.5 43.35,9.45 43.5,9.6 v43.5,10
  Bottom 0.15: v43.5,10 43.5,11 43.3,11.2 40.9,11.2 38.1,14 v37.4,14
BOTTOM
  pour Bottom: -0.4,-0.2 40.1,-0.2 40.1,4.6 45.7,4.6 46.3,5.2 46.3,35.1 -0.4,35.1
D+  (via drill 0.2)
  Top 0.15: D1.4 25.75,22.95 v25.8,23 | U1.P$AD6 v31.5,10.7
  Top 0.152: v27.6,16.6 27.9,16.3 27.9,13.3 v28.2,13
  Bottom 0.152: v25.8,23 27.6,21.2 v27.6,16.6 | v28.2,13 28.2,12 29.9,10.3 31.5,10.3 v31.5,10.7
D-  (via drill 0.2)
  Top 0.15: D1.6 25.75,24.85 v25.8,24.8 | U1.P$AD4 v31,10.7
  Top 0.152: v28.2,16.6 28.2,14.2 28.7,13.7 v28.7,12.9
  Bottom 0.152: v25.8,24.8 28.6,22 28.6,17 v28.2,16.6 | v31,10.7 31,11 29.1,12.9 v28.7,12.9
DEC1
  Top 0.152: C5.1 21.16,22.84 21.7,22.3 25.36,22.3 29.3,17.6 29.3,16.8 U1.P$C1
DN  (via drill 0.2)
  Top 0.152: v23.7,27.3 23.6,27.4 23.68,27.48 J3.A7 23.68,28.02 24.1,27.6 24.4,27.6 24.68,27.88 J3.B7 | D1.1 22.25,25.55 v22.4,25.7
  Bottom 0.15: v23.7,27.3 23.7,27 v22.4,25.7
DP
  Top 0.152: J3.A6 24.18,29.32 23.9,29.6 23.5,29.6 23.18,29.28 J3.B6 23.18,23.18 22.95,22.95 D1.3
EPD_3V3  (via drill 0.35)
  Top 0.3: C1-EP-DR.1 23.3,11.9 v23.8,11.9 23.9,11.8 24.8,11.8 24.8,13.1 26.5,14.8 v26.5,17.2 | v17.3,15.5 17.6,15.2 DMG2305UX-7.3 | EPD_C5.2 v12.3,18 12.3,17.3 12.1,17.1 11.35,16.25 J1.15 J1.16 | v42.8,18.9 42.9,18.8 L5.2 | v33.2,17.7 34.9,19.4 v36.6,19.4
  Power 0.3: v12.3,18 14.8,15.5 v17.3,15.5 17.1,15.3 17.1,14 18,13.1 22.6,13.1 v23.8,11.9 | v26.5,17.2 32.2,17.2 32.7,17.7 v33.2,17.7 | v36.6,19.4 42.3,19.4 v42.8,18.9
EPD_BUSY  (via drill 0.2)
  Top 0.15: J1.9 12.35,19.25 v12.4,19.3 | v32.9,10.2 32.9,10.6 U1.P$AD12
  Bottom 0.15: v12.4,19.3 11.4,19.3 10.3,18.2 10.3,16.1 10.9,15.5 13.4,15.5 15.8,13.1 26.68,13.1 26.68,13.02 29.6,10.1 29.6,9.9 29.25,9.55 29.87,8.9 33,8.9 33.5,9.4 33.5,9.9 33.2,10.2 v32.9,10.2
EPD_CS  (via drill 0.2)
  Top 0.15: J1.12 11.35,17.75 v11.6,18
  Top 0.152: v20.5,17.6 20.6,17.7 20.8,17.7 21.8,18.7 v22.1,18.7 | v24.9,16.5 24.9,16.7 23.9,17.7 v23.7,17.7 | U1.P$K2 v30.4,14.4
  Bottom 0.152: v11.6,18 12.3,17.3 18.2,17.3 18.4,17.1 20,17.1 v20.5,17.6 | v22.1,18.7 22.8,18.7 23.7,17.8 v23.7,17.7 | v24.9,16.5 24.9,15 25.3,14.6 25.7,14.6 26.2,15.1 30,15.1 30.4,14.7 v30.4,14.4
EPD_DC  (via drill 0.2)
  Top 0.15: J1.11 11.15,18.25 11.3,18.4 v11.9,18.4 | v21.5,14.6 v21.5,12.5
  Top 0.152: v32.5,10.6 U1.P$AD10
  Bottom 0.15: v11.9,18.4 11.3,18.4 10.9,18 10.9,16.4 11.1,16.2 15.6,16.2 17.2,14.6 21.4,14.6 | v21.5,12.5 21.8,12.8 26.3,12.8 28.2,10.9 28.5,10.53 28.5,9.8 29.7,8.6 33.1,8.6 33.85,9.35 33.85,10.35 33.5,10.7 32.7,10.7 32.6,10.6 v32.5,10.6
  Bottom 0.152: v21.5,14.6 21.4,14.6
EPD_RST  (via drill 0.2)
  Top 0.15: J1.10 11.55,18.75 11.6,18.8 v12.2,18.8
  Top 0.152: U1.P$AC11 v32.7,11.1
  Bottom 0.15: v12.2,18.8 11.3,18.8 10.6,18.1 10.6,16.3 11.1,15.8 15.1,15.8 17.5,13.4 28.4,13.4 28.5,13.3 29.25,13.3 29.5,13 31.1,11.4 31.2,11.4 32.3,11.5 v32.7,11.1
GDR
  Top 0.152: J1.2 11.53,22.75 R2_EP_DR.2 13.72,23.93 Q3.1
GND  (via drill 0.35)  (1 unrouted)
  Top 0.15: EPD_C10.1 14.1,12.3 14.2,12.4 | EPD_C11.1 15.9,11.7 | 31.7,16 U1.P$75
  Top 0.152: J3.SH2 | 19.58,29.25 J3.SH4 | SJ1.1 15.8,18.8 15.78,18.82 15.6,18.82 | 28.15,25.5 28.23,25.43 X1.2 28.4,25.38 28.62,25.38 | 28.22,29.31 J3.SH3 | 27.5,7.3 C25.2 | 41.4,20.2 C15.2 | 35.3,15.4 U1.P$78
  Top 0.3: C10.2 C16.2 33.1,19.34 33.1,20.4 32.55,20.95 C17.1 30.1,21.16 28.36,21.16 v28.1,20.9 27.25,21.75 C13.2 C2.2 27.25,24.75 28.07,25.57 | 28.07,25.57 27.65,26 C42.2 27.13,26.76 J3.A1_B12 | 28.07,25.57 28.23,25.43 | X1.4 30,24.5 30.7,24.5 30.8,24.6 30.8,25.7 30.3,26.2 29.23,26.2 28.4,25.38 | 35.52,25.8 v35.5,25.8 36.12,26.42 | v38.9,16.6 38.9,16.64 C11.2 38.64,17.45 38.8,17.6 38.8,18.36 C1.2 39.6,19.84 39.6,20.4 40,20.8 40.9,20.8 41.4,20.3 C15.2 42,20 42.2,20.2 C6.2 42.2,24.66 C8.2 | C9.2 39.3,10.64 C27.1 | C9.2 | v37.9,13.5 37.95,13.45 C3.2 C22.2 39.7,12.37 40.81,11.25 U3.1 | C12.2 27.66,5.7 C33.2 27.27,4.07 SW_DN.1 | 27.5,7.3 28.2,7.3 C14.2 28.16,7.5 C7.2 | C12.2 27.4,6.04 C25.2 | C12.2 27.36,5.55 27,5.2 26.8,5.2 26.4,5.6 26.4,6.1 25.9,6.6 C29.1 25.8,6.62 25.8,7.6 25.2,8.2 24.35,8.2 D4.1 22.1,6.15 19.92,3.97 SW_ENT.1 13.4,4.7 12.6,5.5 C31.1 11.3,5.62 11.3,6.9 9.9,8.3 v9.2,8.3 8.86,8.64 8.9,8.69 8.9,10.6 8.54,10.96 J1.MP2 | EPD_C2.1 EPD_C1.1 | EPD_C1.1 12.25,19.75 J1.8 | EPD_C1.1 13.1,19.7 13.97,18.82 R_TYPE_SEL.1 | R_TYPE_SEL.1 15.6,18.82 | R_TYPE_SEL.1 14.4,18.05 EPD_C5.1 14.36,17.55 EPD_C7.1 EPD_C6.1 12.9,17.1 12.8,17.1 12.4,16.7 11.05,15.25 J1.17 | EPD_C8.1 13.7,14.7 EPD_C9.1 | EPD_C9.1 14.7,13.7 14.7,12.9 14.2,12.4 | EPD_C12.1 13.2,11 13.6,10.6 14.8,10.6 15.9,11.7 | EPD_C11.1 16.5,11.7 16.9,12.1 16.9,13.1 v16.4,13.6 15.2,12.4 EPD_C10.1 | IC2.B1 25,11.4 24.9,11.3 23.7,11.3 C1-EP-DR.2 | C23.2 19.68,16.4 20.77,15.3 R3.1 22.23,11.57 C1-EP-DR.2 | C5.2 20.64,23.25 21.3,23.9 D1.2 21.9,23.9 21.2,24.6 21.2,26.2 C43.2 | C5.2 C18.1 | C5.2 20.55,22.9 v20,22.9 | C43.2 22.48,26.5 R2_USB.2
  Top 0.3: C43.2 20.73,27.27 J3.A12_B1 | C24.1 11.4,28 IC9.C1 | C24.1 9.8,28.8 TP_GND.TP | J1.MP1 8.41,24.48 R2_EP_DR.1 10.6,26.57 C24.1 | v24.5,20.9 25.34,20.05 C19.2 IC3.8 IC3.9 | v25.3,26.9 25.1,26.7 R1_USB.1 | U3.6 42.05,9.95 41.9,10.1 | 41.9,10.1 U3.9 | 41.9,10.1 41.25,9.45 U3.4 40.9,9.37 C4.2 | U3.1 C9.2 | U3.1 41.65,10.95 41.9,10.7 41.9,10.1 | 36.12,26.42 J2.3 | J2.5 36.13,26.44 36.12,26.42 | IC9.C1 IC9.C2 IC9.C3 | IC9.B1 IC9.C1 | IC1.D2 20.2,19.6 20.02,19.77 C37.1 19.27,19.77 19.02,19.52 R9.1 17.6,19.1 v17.7,19 17.7,18.5 17.9,18.3 C39.2 | C34.1 35.77,5.9 C38.1 36,5.81 C30.1 35.59,4.36 SW_UP.1 36.67,4.07 C21.2 38.3,4.8 v38.4,4.7 | U1.P$F23 35.3,15.4 | U1.P$B7 31.7,16 | J3.SH2 19.5,33.3 TP_BAT_GND.TP | v29.2,11.7 29,11.5 28.3,11.5 C20.2 28.3,11.38 27.29,12.4 C32.1 | U1.P$74 U1.P$84 | SJ1.1 15.2,18.34 v15.2,14.8 14.8,14.4 EPD_C9.1 | C24.1 10.7,28.9 v10.7,29.8 | C1-EP-DR.2 23.7,10.1 v23.7,9.4
  other vias: 27.2,11.2
  pour GND: 46.3,35.1 46.3,5.2 45.7,4.6 40.1,4.6 40.1,-0.2 -0.4,-0.2 -0.4,35.1
HAPTIC_EN
  Top 0.15: U1.P$U1 29.5,12.2 28,12.2 27.4,12.8 26,12.8 25.7,12.5 IC2.A1
IMU_INT1
  Top 0.152: U1.P$N1 29.6,13.3 29.6,12.8 29.3,12.5 28.1,12.5 27.6,13 27.6,16 27.2,16.4 27.2,17.2 26.3,18.1 26.3,18.2 26.05,18.45 IC3.5
IMU_INT2  (via drill 0.2)
  Top 0.152: v26.5,19.2 26.25,18.95 IC3.6
  Top 0.3: U1.P$P2 v30.4,13.4
  Bottom 0.15: v30.4,13.4 30,13.4 29.5,13.9 28.7,13.9 28.6,14 26.1,14 24.69,14.01 23.2,15.5 22.5,15.5 21.1,16.9 21.1,17.6 20.8,17.9 15.6,23 15.6,27.2 16.1,27.7 21.3,22.5 23.8,22.5 26.5,19.8 v26.5,19.2
LX1
  Top 0.152: L7.1 14.37,28.4 IC9.B3 IC9.B2
LX2
  Top 0.152: L7.2 16.53,28.5 15.1,28.5 14.2,27.6 IC9.D3 IC9.D2
MOSI  (via drill 0.2)
  Top 0.15: J1.14 11.15,16.75 v11.3,16.9 | v21.2,15.8 21.8,16.4 v21.8,17.2 | v24.4,16.6 24.4,15.8 24.6,15.6 v25.4,15.6 | U1.P$B13 v33.2,16.7
  Bottom 0.15: v11.3,16.9 11.7,16.5 17.6,16.5 18.4,15.7 20.8,15.7 20.9,15.8 v21.2,15.8 | v21.8,17.2 22.8,17.2 23.4,16.6 v24.4,16.6 | v25.4,15.6 25.5,15.7 30.2,15.7 30.2,16.8 31.8,18.4 33.4,18.4 33.8,18 33.8,16.9 33.6,16.7 v33.2,16.7
N$1
  Top 0.152: U1.P$D2 30.3,16.05 30.39,16.61 30.3,16.7 30.3,16.9 30.1,17.1 30.1,18.97 X2.1 30,20.45 C17.2
N$2
  Top 0.152: C18.2 21.36,22 24.9,22 29,17.4 29,16.7 29.8,15.8 30.1,15.5 | X2.2 28.7,16.83 28.7,16.6 29.6,15.6 29.7,15.5 30.1,15.5 | 30.1,15.5 30.2,15.4 U1.P$F2
N$4
  Top 0.152: L3.1 30.7,19.3 L2.2
N$5
  Top 0.152: L2.1 U1.P$B3
N$6  (via drill 0.2)
  Top 0.15: v37.2,16.3 36.55,15.65 U1.P$E24 | v31.5,19.1 31.95,19.1 C16.1
  Top 0.152: U1.P$E24 38.75,15.65 40,16.9 40,18.3 40.4,18.5 C15.1 | U1.P$B5 31.2,17.3 31.7,17.8 31.84,17.8 C10.1 C16.1 32.3,19.05 L3.2
  Bottom 0.15: v31.5,19.1 33.3,19.1 36.1,16.3 v37.2,16.3
N$7
  Top 0.152: C13.1 28.66,21.6 36.2,21.6 37.5,20.3 37.5,19.3 36.7,18.5 35.7,18.5 34.45,17.25 U1.P$A18
N$8
  Top 0.152: U1.P$D23 36.3,16.25 36.55,16.25 36.8,16.5 36.8,17.1 37.6,17.9 38.05,17.9 C11.1
N$9
  Top 0.152: U1.P$B24 36.45,17.2 C1.1 37.95,18.9 38.64,19.6 38.64,20.16 36.6,22.2 31.7,22.2 30.4,23.5 29.2,23.5 29,23.7 29,24.8 29.57,25.38 X1.1
N$11
  Top 0.152: X1.3 27.75,23.7 C2.1 30.1,23.2 31.4,21.9 36.4,21.9 38.2,20.1 38.2,19.6 37.6,19 37.6,18.8 U1.P$A23
N$12
  Top 0.152: U1.P$N24 36.85,13.65 39.05,11.46 C9.1
N$13
  Top 0.152: R9.2 19.07,20.07 19.2,20.2 20.5,20.2 IC1.D1
N$14
  Top 0.152: L1.1 38.6,14.05 C3.1 38.5,14.2 37.6,15.1 36.15,15.1 U1.P$H23
N$15  (via drill 0.2)
  Top 0.15: v39.6,15.9 L1.2 | ANT1.1 44.4,8.3 v44.8,8.3 44.75,8.35 C4.1
  Top 0.152: L1.2 39.6,14.05 C22.1
  Bottom 0.15: v39.6,15.9 42.8,12.7 45.2,12.7 45.5,12.4 45.5,9 v44.8,8.3
N$16
  Top 0.15: C20.1 29.33,10.95 30.5,11.1 31.15,11.1 U1.P$AC5
N$20
  Top 0.152: IC3.7 C19.1 25.86,20.45 24.7,21.6 24.3,21.6 23.9,21.2 23.9,20.6 24.35,20.15 IC3.10
N$21
  Top 0.152: R3.2 23.65,15.3 23.65,16.78 23.3,17.06 23.3,17.9 23.5,18.1 24.07,18.1 24.25,17.93 IC3.1
N$22
  Top 0.152: R_TYPE_SEL.2 R1_EP_DR.1 15.36,20.02 SJ1.2
N$23
  Top 0.152: R2.2 13.6,26.3 12.9,27 IC9.E1
N$24
  Top 0.152: R2_USB.1 22.8,27.48 22.48,27.8 22.3,27.8 22.18,27.92 J3.B5
N$26
  Top 0.152: R4.2 12.6,25.3 12,25.9 12,27.4 12.2,27.6 IC9.D1
N$28  (via drill 0.2)
  Top 0.15: v43.9,12 L5.1
  Top 0.152: C2-EP-DR.2 19.95,11 D5.2 | C2-EP-DR.2 20.8,11.6 20.8,14.6 19.5,15.9 18,15.9 16.9,17 16.9,22.7 16.15,23.45 Q3.3 | C2-EP-DR.2 20.1,10.9 v20.1,10
  Bottom 0.152: v43.9,12 44.8,12 44.8,9.6 42.9,7.7 22.4,7.7 v20.1,10
N$29
  Top 0.152: D4.2 22.3,9.9 C2-EP-DR.1 21.2,9.7 20.1,8.6 17.6,8.6 15.15,6.15 D2.1
N$30
  Top 0.152: C32.2 26.2,12.4 IC2.A2
N$31
  Top 0.152: EPD_C2.2 13.1,22.1 13,22.2 11.8,22.2 11.35,21.75 J1.4
N$32
  Top 0.15: EPD_C1.2 11.9,20.6 11.25,21.25 J1.5
N$34
  Top 0.152: EPD_C6.2 12.8,16.2 11.35,14.75 J1.18
N$35
  Top 0.152: EPD_C7.2 13.5,15.7 12.7,15.7 11.6,14.6 11.6,14.5 11.35,14.25 J1.19
N$36
  Top 0.15: EPD_C8.2 10.68,13.7 J1.20
N$37
  Top 0.152: R1_USB.2 24.02,26.82 24.7,27.5 25,27.5 25.18,27.68 J3.A5
N$38
  Top 0.15: EPD_C10.2 13.2,12.2 13.2,12.6 13.05,12.75 J1.22
N$40
  Top 0.15: J1.24 12.35,11.75 EPD_C12.2
OUT+
  Top 0.15: TP_OP.TP 32.6,6.5 31.7,6.5 31.7,7.4 30.6,8.8 30.6,9.8 30.1,10.3 27.9,10.3 27.8,10.4 27.8,11.3 27.2,11.9 IC2.A3
OUT-
  Top 0.15: TP_ON.TP 30.3,7 30.3,9.7 30,10 27.7,10 27,10.7 26.9,10.7 IC2.C3
P0.13  (via drill 0.2)
  Top 0.15: v32.1,6.9 32.1,9.9 31.95,10.05 U1.P$AD8
  Top 0.152: R5.1 32.5,5.12 SW_UP.2 | C30.2 35.14,5.32 R5.1 | R5.1 32.27,5.3 v31.8,5.3
  Bottom 0.15: v31.8,5.3 31.8,6.6 v32.1,6.9
P0.14  (via drill 0.2)
  Top 0.15: v29.9,9.5 29.7,9.7 27.3,9.7 v27.1,9.9 | U1.P$AC9 32.15,11.1 v32.1,11.1
  Top 0.152: SW_ENT.2 10.6,5.29 C31.2 10.81,6.12 R8.1 10.68,6 v10.2,6
  Bottom 0.15: v10.2,6 14.9,10.7 16.7,10.7 17.97,11.97 22.54,11.76 24.7,9.6 26.8,9.6 v27.1,9.9 | v29.9,9.5 30.3,9.9 31.5,9.9 32.1,10.5 v32.1,11.1
P1.01  (via drill 0.2)
  Top 0.15: v38.6,10.2 38.7,10.1 38.7,8.7 37.8,7.8 v37.8,7.3 | U1.P$Y23 v36.1,11.9
  Top 0.152: DMG2305UX-7.1 18.05,12.47 R_RWR_EPD.1 18.52,11.4 v18.4,11.4
  Bottom 0.15: v18.4,11.4 19.6,10.2 19.6,9.7 21.9,7.4 37.7,7.4 v37.8,7.3
  Bottom 0.152: v38.6,10.2 36.5,10.2 36.1,10.6 v36.1,11.9
P1.02  (via drill 0.2)
  Top 0.15: R7.1 25.12,6.9 C29.2
  Top 0.152: SW_DN.2 21.85,4.42 21.85,4.85 22.1,5.1 23.91,5.1 C29.2 25.41,6.29 v25.6,6.1 | v39,11 37.9,11 36.7,12.2 v36.5,12.2 U1.P$W24
  Bottom 0.152: v25.6,6.1 29.4,6.1 30.9,4.6 36.9,4.6 39.7,7.4 43.1,7.4 43.6,7.9 45.15,9.45 45.15,12.25 45,12.4 40.1,12.4 38,14.5 37,14.5 36.8,14.3 36.8,13.9 39,11.7 v39,11
PMIC_INT  (via drill 0.2)
  Top 0.15: IC1.A1 21.9,20.2 22.2,20.5 22.9,20.5 23,20.4 23,20.1 23.3,19.8 23.3,18.4 23,18.1 23,16.9 23.3,16.6 23.3,15.8 22.3,15.8 22.2,15.9 22.2,18 22.05,18.15 21.65,18.15 20.6,17.1 v20.6,17
  Top 0.3: U1.P$T2 v30.4,12.9
  Bottom 0.15: v20.6,17 22.4,15.2 23,15.2 24.5,13.7 28.5,13.7 28.6,13.6 29.4,13.6 30.1,12.9 v30.4,12.9
PREVGH
  Top 0.15: EPD_C9.2 13.75,13.15 10.72,13.15 J1.21
  Top 0.152: 17.45,5 17.4,5 | 17.4,5 13.7,5 9.5,9.2 9.5,12.6 10.15,13.25 J1.21 | 17.4,5 18.55,6.15 D5.1
PREVGL
  Top 0.152: J1.23 9.95,12.25 9.8,12.1 9.8,11 11.15,9.65 D2.2 15,9.7 EPD_C11.2
RESE
  Top 0.15: J1.3 11.45,22.25 12.15,22.95 Q3.2 14.4,22.6 R1_EP_DR.2
RESET  (via drill 0.2)
  Top 0.15: v34.3,10.1 35.3,9.1 TP_RESET.TP | J2.6 34.51,27.69 33.3,28.9 | U1.P$AC13 33.2,11.1 v33.7,11.1
  Top 0.152: 33.3,28.9 v33.3,29
  Bottom 0.15: v34.3,10.1 34.3,10.6 33.8,11.1 v33.7,11.1
  Bottom 0.152: v33.3,29 32.9,28.6 32.3,28.6 30.8,27.1 30.8,23.2 33,21 33.4,21 37.7,16.85 37.7,16.2 37,15.5 36.3,15.5 35.7,14.9 35.7,11.4 35.4,11.1 v33.7,11.1 | 34.2,10.1 v34.3,10.1
SCK  (via drill 0.2)
  Top 0.15: J1.13 10.72,17.35 11.55,17.35 v11.6,17.3 | v20.7,16.2 20.7,16.4 21.3,17 21.3,17.4 21.6,17.7 v21.8,17.7 | v23.8,17.2 24,17 24,15.4 24.4,15 v25.5,15 | U1.P$A12 v32.9,17.2
  Bottom 0.15: v11.6,17.3 12,16.9 17.7,16.9 18.4,16.2 v20.7,16.2 | v21.8,17.7 22.9,17.7 23.4,17.2 v23.8,17.2 | v25.5,15 25.9,15.4 30.5,15.4 30.5,16.4 31.3,17.2 v32.9,17.2
SCL  (via drill 0.2)
  Top 0.15: R17.2 17.4,24.82 v17.4,24.8 | v28.6,9.1 28.43,9.27 27.1,9.3 26.7,9.7 25.5,9.7 25.1,10.1 25.1,10.3 IC2.C1 | v44,10.4 43.95,10.45 U3.7 | v25.3,12.1 25.3,12.7 v27,14.4
  Top 0.152: 24.2,18.4 24.27,18.4 IC3.12 24.15,18.45 | R17.2 15.4,25.62 R4.1 15.98,25.3 18.11,23.57 18.35,23.57 19.9,21.81 20.31,21.4 20.7,21.4 21.5,20.6 21.5,20.2 | TP1.TP 19.4,25 19.4,22.7 20.4,21.7 23,21.7 23.6,21.1 23.6,20.4 23.9,20.1 23.9,18.7 24.2,18.4 | 21.5,20.2 IC1.B1 | 21.5,20.2 22.15,20.85 23.05,20.85 23.3,20.6 23.3,20.2 23.6,19.9 23.6,18.7 23.9,18.4 24.2,18.4 | U1.P$M2 v30.4,13.9
  Bottom 0.15: v30.4,13.9 30.3,13.9 29.9,14.3 | 29.9,14.3 29.4,14.8 26.4,14.8 25.9,14.3 24.9,14.3 23.4,15.8 22.6,15.8 21.4,17 21.4,19 19.9,20.5 17.4,22.99 v17.4,24.8 | v44,10.4 44,9.9 42.4,8.3 29.4,8.3 v28.6,9.1 | 29.9,14.3 29,14.3 28.9,14.3 27.1,14.3 v27,14.4 | IC2.C1 25.3,11.3 v25.3,12.1
  other vias: 25.7,10.9
SDA  (via drill 0.2)
  Top 0.15: v41.1,11.9 41.84,11.9 U3.8 | v28.6,16.1 29.4,15.3 29.4,14.3 29.55,14.15 U1.P$L1 | v24.3,12.3 23.6,13 TP2.TP
  Top 0.152: v16.4,26.8 16.4,26.7 16,26.3 15.7,26.6 15.7,26.62 | TP2.TP 25.2,14 26,14.8 v26,16.1 25.9,16.1 25,17 25,17.27 24.85,17.43 IC3.2 | v20.5,20.8 21.1,20.2 IC1.C1 | R18.2 15.7,26.62 | 15.7,26.62 R2.1
  Bottom 0.15: v28.6,16.1 28.5,16.2 26.1,16.2 v26,16.1 | v41.1,11.9 41.5,11.5 43.8,11.5 44.4,10.9 44.4,9.6 42.8,8 28.82,8 28,9.1 27.9,9.2 27.9,9.7 IC2.B2 26.2,12.1 25.8,12.5 24.5,12.5 v24.3,12.3
  Bottom 0.152: v16.4,26.8 19.4,23.8 19.4,21.6 20.2,20.8 v20.5,20.8 20.5,21.3 20.9,21.7 23.7,21.7 23.9,21.5 23.9,18.1 25.9,16.1 v26,16.1
  other vias: 26.2,11.4
SWDCLK  (via drill 0.2)
  Top 0.15: v34.2,25.9 34.35,25.9 J2.4 35.5,27.05 35.5,29.8 35.9,30.2 41.9,30.2 TP_SWDCLK.TP | U1.P$AA24 36.5,11.7 v36.6,11.7
  Bottom 0.15: v34.2,25.9 33.8,25.5 32.4,25.5 31.3,24.4 31.3,23.29 35.8,19.2 38,17 38,16.1 37.1,15.2 36.5,15.2 36.2,14.9 36.2,13.7 37.7,12.2 37.7,12 37.4,11.7 v36.6,11.7
SWDIO  (via drill 0.2)
  Top 0.15: J2.2 34.6,24.88 v34.6,24.3 | v43.1,31.1 TP_SWDIO.TP
  Top 0.152: U1.P$AC24 v36.5,11.2
  Bottom 0.15: v43.1,31.1 43.9,31.1 44.5,30.5 44.5,28.7 40.8,25 40.8,24.5 38.6,22.3 35.9,22.3 34.6,23.6 v34.6,24.3 34.6,23 38.4,19.2 38.4,16.1 37.2,14.9 36.7,14.9 36.5,14.7 36.5,13.8 38.1,12.2 38.1,11.6 37.7,11.2 v36.5,11.2
SWO
  Top 0.152: U1.P$AD22 36.9,9.2 TP_SWO.TP
TOP
  pour Top: -0.4,35.1 46.3,35.1 46.3,5.2 45.7,4.6 40.1,4.6 40.1,-0.2 -0.4,-0.2
VBAT  (via drill 0.35)
  Top 0.3: IC1.C2 21.1,19.3 20.93,19.12 19.6,19.12 C37.2 19.18,18.9 v18.7,18.9 | U3.3 40.35,9.95 39.9,9.5 39.9,9 39.73,8.82 C27.2 39.3,8.72 38.8,8.22 TP_VBAT.TP | U3.2 U3.3 | U3.3 40.25,9.95 v39.9,10.3
  Power 0.3: v39.9,10.3 39.9,14.7 44,18.8 44,21.4 42.7,22.7 39.6,22.7 37.7,20.8 30.4,20.8 27,24.2 22.5,24.2 15,31.7 11.4,31.7 9.6,29.9 9.6,25.4 10.2,24.8 12.2,24.8 13.4,23.6 13.4,18.5 15.4,16.5 19,16.5 19.5,17 19.5,18.2 18.8,18.9 v18.7,18.9
VBUS  (via drill 0.35)
  Top 0.3: v22.2,27.1 21.9,27.1 C43.1 21.53,27.53 J3.A9_B4 21.5,28.62 | J3.A4_B9 26.33,26.93 25.82,26.43 C42.1 25.73,25.9 v24.9,25.9 24.2,25.9 23.7,25.4 23.7,24.2 24,23.9 D1.5 25.05,23.6 v26.3,23.6 | C21.1 37.1,6.1 v37.1,6.7 36.02,6.7 C38.2 | U1.P$AD2 30.4,10.6 30.4,10.5 31.1,9.8 v31.1,9.4 | v22.8,16.3 22.6,16.5 22.6,19 22,19.6 IC1.A2 22.4,19.6 v22.6,19.8
  Power 0.3: v24.9,25.9 23.4,25.9 v22.2,27.1 | v37.1,6.7 36.3,7.5 33,7.5 v31.1,9.4 30.3,8.6 28.3,8.6 27.8,9.1 27.8,11.5 27.6,11.7 22.9,16.3 v22.8,16.3 | v22.6,19.8 24.9,22.1 26,22.1 26.3,22.4 v26.3,23.6
VREG  (via drill 0.35)
  Top 0.152: C23.1 19.12,16.9
  Top 0.3: 19.12,16.9 19.12,17.12 19.4,17.4 19.6,17.4 C39.1 20.7,18.1 21.5,18.9 IC1.B2 | TP_VREG.TP 18.1,21.3 v18.1,23 | v18.7,17.6 19.12,17.18 C23.1 | v14.1,29.9 14.1,29.2 IC9.A3 IC9.A2 IC9.A1 C24.2
  Power 0.3: v14.1,29.9 14.1,20.3 16.8,17.6 v18.7,17.6 18.2,17.6 16.7,19.1 16.7,21.6 v18.1,23